# Altium PCB CH340N4T-R0.PcbDoc
Units mil, origin at the board's own origin, x right, y up, seen from the top; angles counter-clockwise.
Board outline 570 x 1109 mil, 2 copper layers (Top Layer, Bottom Layer); 12 components, 11 nets, 39 pads, 46 vias.
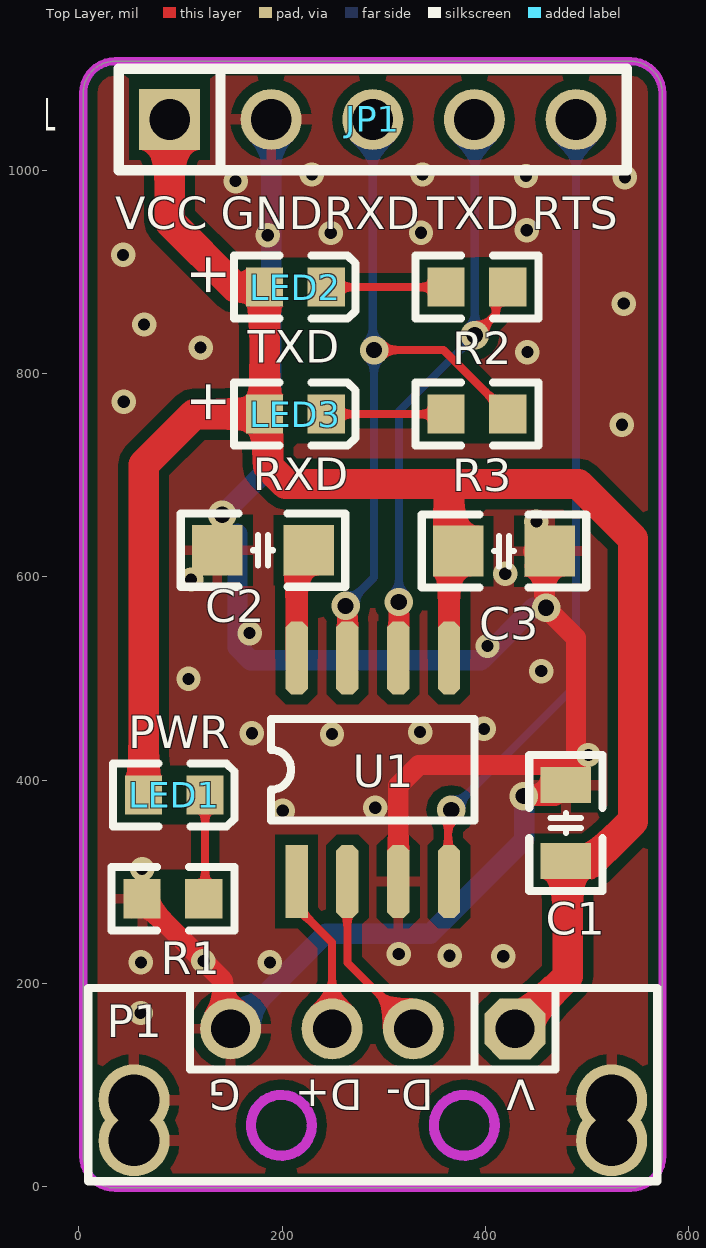
[diagram p0: Top Layer view]
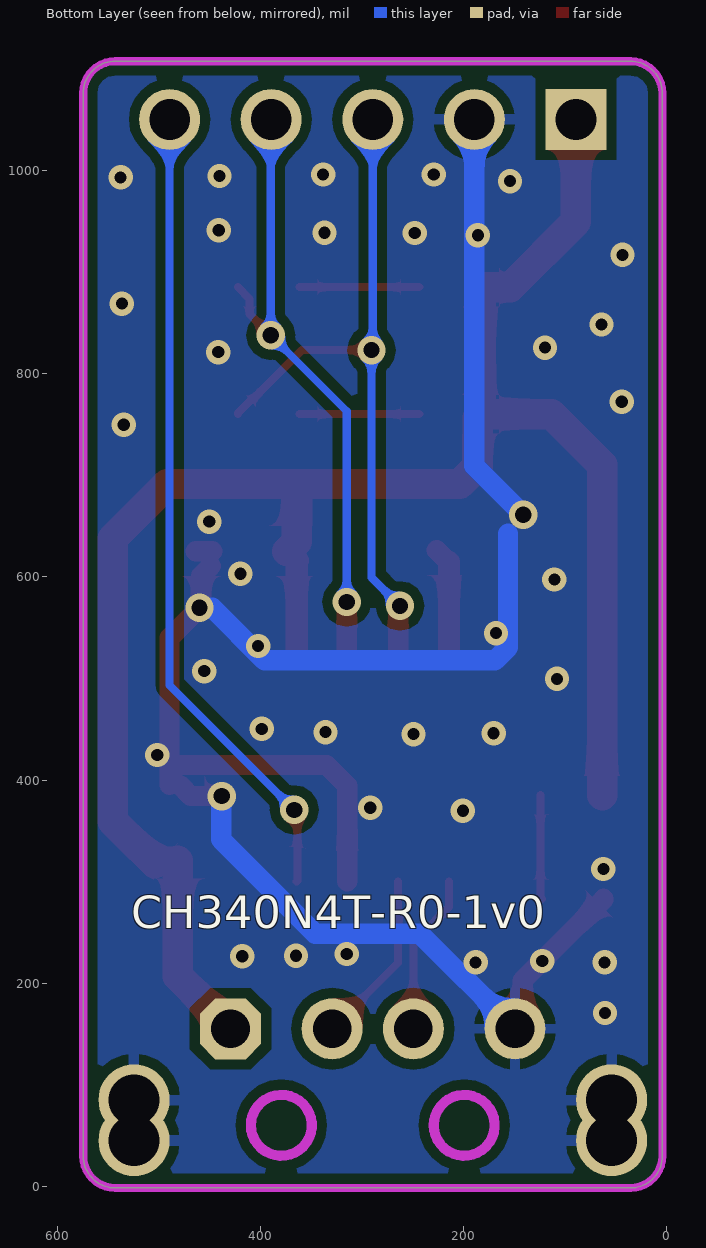
[diagram p1: Bottom Layer view, seen from below]

## Layer stack, top to bottom
Top Solder: solder mask 0.4, Solder Resist, Dk 3.5
Top Layer: signal copper 1.4
Dielectric 1: dielectric 12.6, FR-4, Dk 4.8
Bottom Layer: signal copper 1.4
Bottom Solder: solder mask 0.4, Solder Resist, Dk 3.5

## Board outline
4.22,30.01 ccw(c35.72,30.01) 35.72,-1.49 542.72,-1.49 ccw(c542.72,30.01) 574.22,30.01 574.22,1076.02 ccw(c542.72,1076.02) 542.72,1107.52 35.72,1107.52 ccw(c35.72,1076.02) 4.22,1076.02

## Design rules (kind name [scope] priority, off if disabled: settings)
Clearance Clearance_1 [InPolygon] p1: gap=10 ignorepadtopadclearanceinfootprint=FALSE
Clearance [All] p2: gap=6 ignorepadtopadclearanceinfootprint=FALSE
ComponentClearance [All] p1 off: gap=10 collisioncheckmode=3 verticalgap=10 showdistances=FALSE
DiffPairsRouting [All] p1: maxlimit=10 minlimit=7 mostfreqgap=8 toplayer_minwidth=6 toplayer_maxwidth=15 toplayer_prefwidth=8 bottomlayer_minwidth=6 bottomlayer_maxwidth=15 bottomlayer_prefwidth=8 maxuncoupledlength=500
MinimumSolderMaskSliver [All] p1 off: minsoldermaskwidth=10
PolygonConnect PolygonConnect_1 [IsVia] p1: connectstyle=Direct reliefconductorwidth=10 reliefentries=4 polygonreliefangle="90 Angle" airgapwidth=10
PolygonConnect [All] p2: connectstyle=Relief reliefconductorwidth=10 reliefentries=4 polygonreliefangle="90 Angle" airgapwidth=10
RoutingVias [All] p1: holewidth=16 width=28 viastyle="Through Hole" minholewidth=12 minwidth=24 maxholewidth=28 maxwidth=50
SilkToSilkClearance [All] p1 off: silktosilkclearance=10
SilkToSolderMaskClearance [IsPad] p1 off: minsilkscreentomaskgap=10 clearancetoexposedcopper=TRUE
SolderMaskExpansion [All] p1: expansion=4 istentingtop=FALSE
Width [All] p1: maxlimit=100 minlimit=6 preferedwidth=10
25 further rules are at their usual default settings.

## Classes and differential pairs
differential pair NewDifferentialPair1: +UD+ -UD-

## Components (designator, comment, footprint, x,y, rotation, side; value= is the part's Value field where it differs from the comment)
C1 "10uF" "C 0805_L" 479.22,357.76 r90 top
C2 "0.1uF" "C 0805_M" 181.18,626.23 r180 top
C3 "0.1uF" "C 0805_M" 418.38,625.35 r180 top
JP1 "Header 5" SIP5-2.54mm 89.22,1050.16 r90 top
LED1 "PWR" 0603+ 63.59,385.16 r0 top
LED2 "TXD" 0603+ 182.79,885.16 r0 top
LED3 "RXD" 0603+ 182.79,760.16 r0 top
P1 "USB" USBAM 429.22,155.16 r180 top
R1 "2K" 0603 122.84,283.13 r180 top
R2 "2K" 0603 361.41,885.16 r0 top
R3 "2K" 0603 361.41,760.16 r0 top
U1 "CH340N" SOP8 214.22,300.16 r0 top

## Footprints (in the part's own frame and the unit in brackets; to place one, negate y for a bottom-side part, rotate by r counter-clockwise, add the part's x,y. Pads: shape width x height; smd on the part's side, far side on the other; paste and mask are expansions set on the pad)
0603 [mm]
  rect 0.93x0.98 smd: 1(0,0) 2(1.54,0)
  silkscreen extent -0.76,-0.79 2.3,0.79
0603+ [mm]
  rect 0.93x0.98 smd: 1(0,0) 2(1.54,0)
  silkscreen extent -0.76,-0.79 2.27,0.79
"C 0805_L" [mil] "无极性贴片电容"
  rect 35x50 smd: 1(-37.4,0) 2(37.4,0)
  silkscreen extent -67,-36 67,36, body extent -39,-24 39,24, height 20
"C 0805_M" [mil] "无极性贴片电容"
  rect 50x50 smd: 1(-45,0) 2(45,0)
  silkscreen extent -81,-36 81,36, body extent -39,-24 39,24, height 20
SIP5-2.54mm [mil]
  rect 60x60 hole 40: 1(0,0)
  round 60 hole 40: 2(0,-100) 3(0,-200) 4(0,-300) 5(0,-400)
  silkscreen extent -50,-450 50,50
SOP8 [mil]
  rect 22x72 smd: 1(0,0)
  oct 22x72 smd: 2(50,0) 3(100,0) 4(150,0) 5(150,220) 6(100,220) 7(50,220) 8(0,220)
  silkscreen extent -25,60 175,160
USBAM [mil]
  round 70 hole 50: 0(-95,70) 0(-95,110) 0(375,70) 0(375,110)
  oct 60x60 hole 38: 1(0,0)
  round 60 hole 38: 2(100,0) 3(180,0) 4(280,0)
  Keep-Out Layer circle w10: c50,95 r30
  Keep-Out Layer circle w10: c230,95 r30
  silkscreen extent -140,-40 420,150

## Part data
C1 C2 C3: library part CAP, "Capacitor"
JP1: "Header, 5-Pin"
LED1: library part LED2, "Typical RED, GREEN, YELLOW, AMBER GaAs LED", PackageDocument=Feb-2002
LED2 LED3: library part LED2, "Typical RED, GREEN, YELLOW, AMBER GaAs LED"
R1 R2 R3: library part Res2, "Resistor"
U1: "USB to TTL Serial / UART"

## Via types
v1: diameter 24, hole 12, Top Layer to Bottom Layer, tented both sides, 38 vias
v2: diameter 28, hole 16, Top Layer to Bottom Layer, tented both sides, 8 vias

## Nets (pads, with @x,y where several pads share a name; then routed paths per layer and width w, separated by ;. In a path a pad name is that pad's centre, name@x,y a point inside that pad or via, vN(x,y) a via of type N, cw(c..) or ccw(c..) an arc to the next point about the centre after c; other vN are vias at no path point)
GND: C1.2 C2.2 C3.1 JP1.2 P1.0 P1.4 R1.2 U1.3 | length 1998.4
  Top Layer w20: R1.2 62.21,282.15 141.57,202.79 141.57,162.81 P1.4 ; U1.3 314.22,394.58 334.41,414.77 489.22,414.77 ; v2(437.84,384.24) 468.3,384.24 C1.2 ; C3.1@447.22,625.35 C3.1 ; C3.1@448.7,610.68 458.22,601.16 v2@458.22,571.12 ; v2(459.75,569.59) v2@458.22,571.12 ; C1.2@489.22,395.16 489.22,414.77 ; v2@458.22,571.12 489.22,540.12 489.22,414.77
  Bottom Layer w20: v2(141.18,661.23) 189.22,709.27 JP1.2 ; P1.4 242.87,248.81 345.75,248.81 438.35,341.41 438.35,383.73 v2(437.84,384.24) ; 156.13,642.51 156.13,530.78 168.87,518.04 395.8,518.04 447.35,569.59 v2(459.75,569.59)
  other v1: 60.68,170.7 61.02,220.52 187.97,220.52 122.47,221.89 364.84,227.1 417.6,226.67 314.86,228.81 62.21,312.42 200.57,369.83 291.73,372.67 501.42,424.67 249.11,445.24 170.26,446.03 335.8,447.2 398.56,450.34 107.85,499.56 455.05,507.22 402.09,531.93 167.99,544.66 110.43,597.43 419.56,603.13 450.24,654.35 534.42,749.63 44.18,772.28 441.4,821.19 119.72,825.63 64.13,848.35 536.18,868.9 43.43,916.92 185.75,936.26 247.94,938.43 336.72,938.64 440.73,941.2 154.21,989.56 537.41,993.2 440.06,994.54 229.27,996.05 338.11,996.05
NetC2_1: C2.1 U1.8 | length 111
  Top Layer w20: C2.1@214.22,614.27 C2.1
  Top Layer w22: U1.8 C2.1@214.22,614.27
NetLED1_2: LED1.2 R1.1 | length 102.6
  Top Layer w8: R1.1 124.22,284.51 LED1.2
NetLED2_2: LED2.2 R2.1 | length 118
  Top Layer w8: LED2.2 R2.1
NetLED3_2: LED3.2 R3.1 | length 118
  Top Layer w8: LED3.2 R3.1
RTS: JP1.5 U1.4 | length 802.4
  Top Layer w8: U1.4 363.43,300.95 363.43,367.55 v2(366.5,370.62)
  Bottom Layer w8: v2(366.5,370.62) 489.22,493.34 JP1.5
RXD: JP1.3 R3.2 U1.7 | length 707.8
  Top Layer w8: v2(262.44,571.37) 262.44,563.56 v2@262.4,563.51 ; v2(290.47,823.24) 358.96,823.24 406.75,775.45 407.74,775.45 422.04,761.14 R3.2 ; v2@262.4,563.51 264.22,563.51 264.22,561.69 v2@262.4,563.51
  Top Layer w20: U1.7 v2@264.22,561.69
  Bottom Layer w8: v2(262.44,571.37) 290.47,599.4 v2(290.47,823.24) ; JP1.3 289.22,830.57 290.39,829.4 v2@290.39,820.2
TXD: JP1.4 R2.2 U1.6 | length 673.2
  Top Layer w8: U1.6@314.88,524.5 U1.6@314.94,524.44 ; v2(314.88,575.26) 314.88,564.3 314.94,564.24 U1.6@314.94,524.44 ; v2(389.64,837.81) 410.38,858.55 410.38,873.5 R2.2 ; U1.6@314.94,524.44 314.94,520.88 U1.6 319.22,520.16 U1.6@314.94,524.44
  Top Layer w20: U1.6@314.88,524.5 v2@314.88,564.3
  Bottom Layer w8: v2(314.88,575.26) 314.88,763.05 v2(389.64,837.81) 389.64,841.28 389.64,1049.74 JP1.4
UD+: P1.3 U1.1 | length 159.5
  Top Layer w8: U1.1 214.22,275.16 221.22,268.16 249.22,240.16 P1.3
UD-: P1.2 U1.2 | length 171.9
  Top Layer w8: U1.2 264.22,220.16 P1.2
VCC: C1.1 C3.2 JP1.1 LED1.1 LED2.1 LED3.1 P1.1 U1.5 | length 1949.9
  Top Layer w22: U1.5 C3.2@364.18,616.16
  Top Layer w24: C3.2@364.18,616.16 C3.2
  Top Layer w30: LED1.1 63.59,710.43 113.32,760.16 LED3.1 ; JP1.1 89.22,949.71 153.77,885.16 LED2.1 LED3.1 ; 363.99,686.88 363.99,634.74 C3.2 ; P1.1 480.97,206.91 C1.1@480.97,320.36 ; C1.1@503.78,318.1 545.34,359.67 545.34,637.49 491.44,691.4 203.67,691.4 186.1,708.97 186.1,756.85 LED3.1

## Polygon pours and split planes (outlines as drawn)
GND on Top Layer "GND_L" (solid, remove dead copper, pour order 1): 0,1111.79 0,0 585.97,0 585.97,1109.85
GND on Bottom Layer "GND_L" (solid, remove dead copper, pour order 0): 1.94,1109.85 1.94,-1.94 580.15,-1.94 580.15,1107.91

## Keep-outs
Keep-Out Layer:
  lines w8: 35.72,-1.49 cw(c35.72,30.01) 4.22,30.01 4.22,1076.02 cw(c35.72,1076.02) 35.72,1107.52 542.72,1107.52 cw(c542.72,1076.02) 574.22,1076.02 574.22,30.01 cw(c542.72,30.01) 542.72,-1.49 ; 35.72,-1.49 542.72,-1.49 ; 35.72,-1.49 542.72,-1.49

## Silkscreen, mask and mechanical layers (free items; w line width, h text height)
Top Overlay:
  text "VCC" at 35.81,942.24 h32
  text "GND" at 139.66,942.24 h32
  text "RXD" at 241.59,942.24 h32
  text "TXD" at 342.74,942.24 h32
  text "RTS" at 445.51,942.24 h32
Bottom Overlay:
  text "CH340N4T-R0-1v0" at 527.14,253.9 h32
Mechanical 1:
  the board outline again, w8

## Text inside footprints (layer, text, board x,y; h text height)
LED2: Top Overlay "+" at 144.71,874.17 h40 r90
LED3: Top Overlay "+" at 144.71,749.17 h40 r90
P1: Top Overlay "D-" at 349.22,105.16 h30 r180; Top Overlay "D+" at 279.22,105.16 h30 r180; Top Overlay "V" at 449.22,105.16 h30 r180; Top Overlay "G" at 159.22,105.16 h30 r180